# Altium PCB 超声波车位检测.PCBDOC
Units mil, origin at the board's own origin, x right, y up, seen from the top; angles counter-clockwise.
Board outline 6000 x 4000 mil, 2 copper layers (Top Layer, Bottom Layer); 26 components, 50 nets, 148 pads, 0 vias.
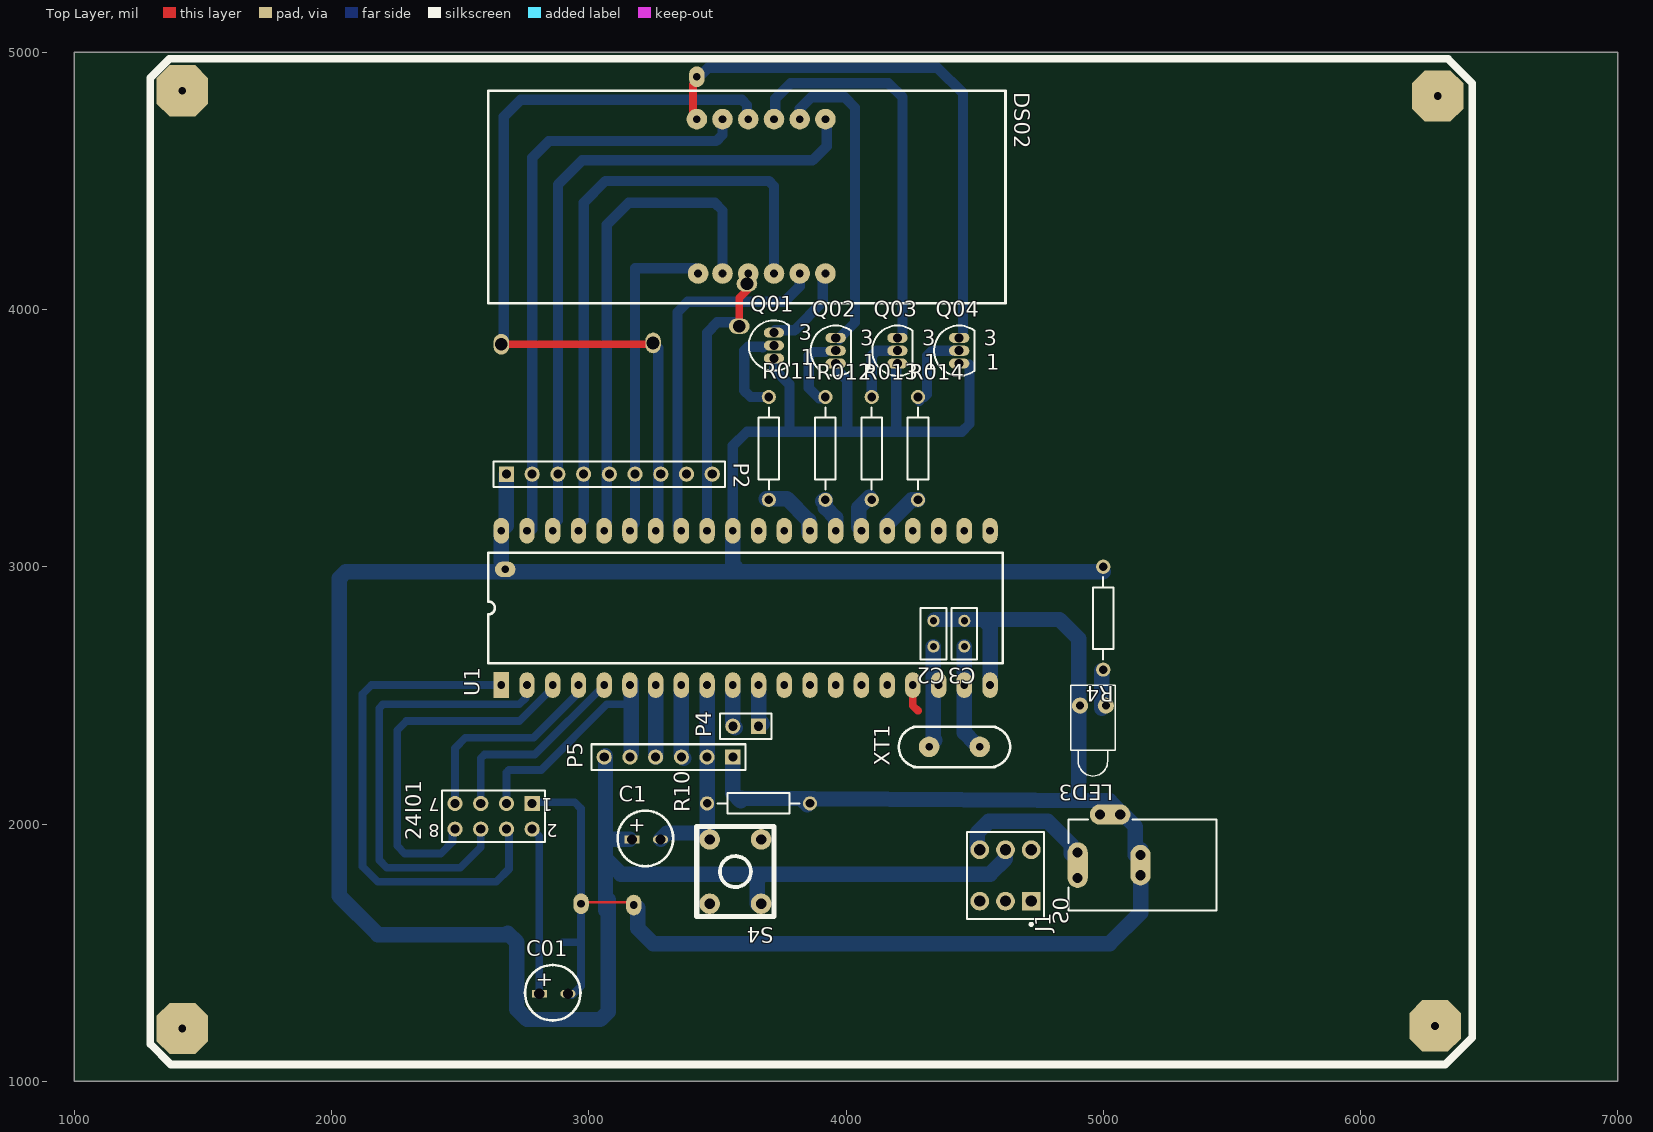
[diagram p0: Top Layer view]
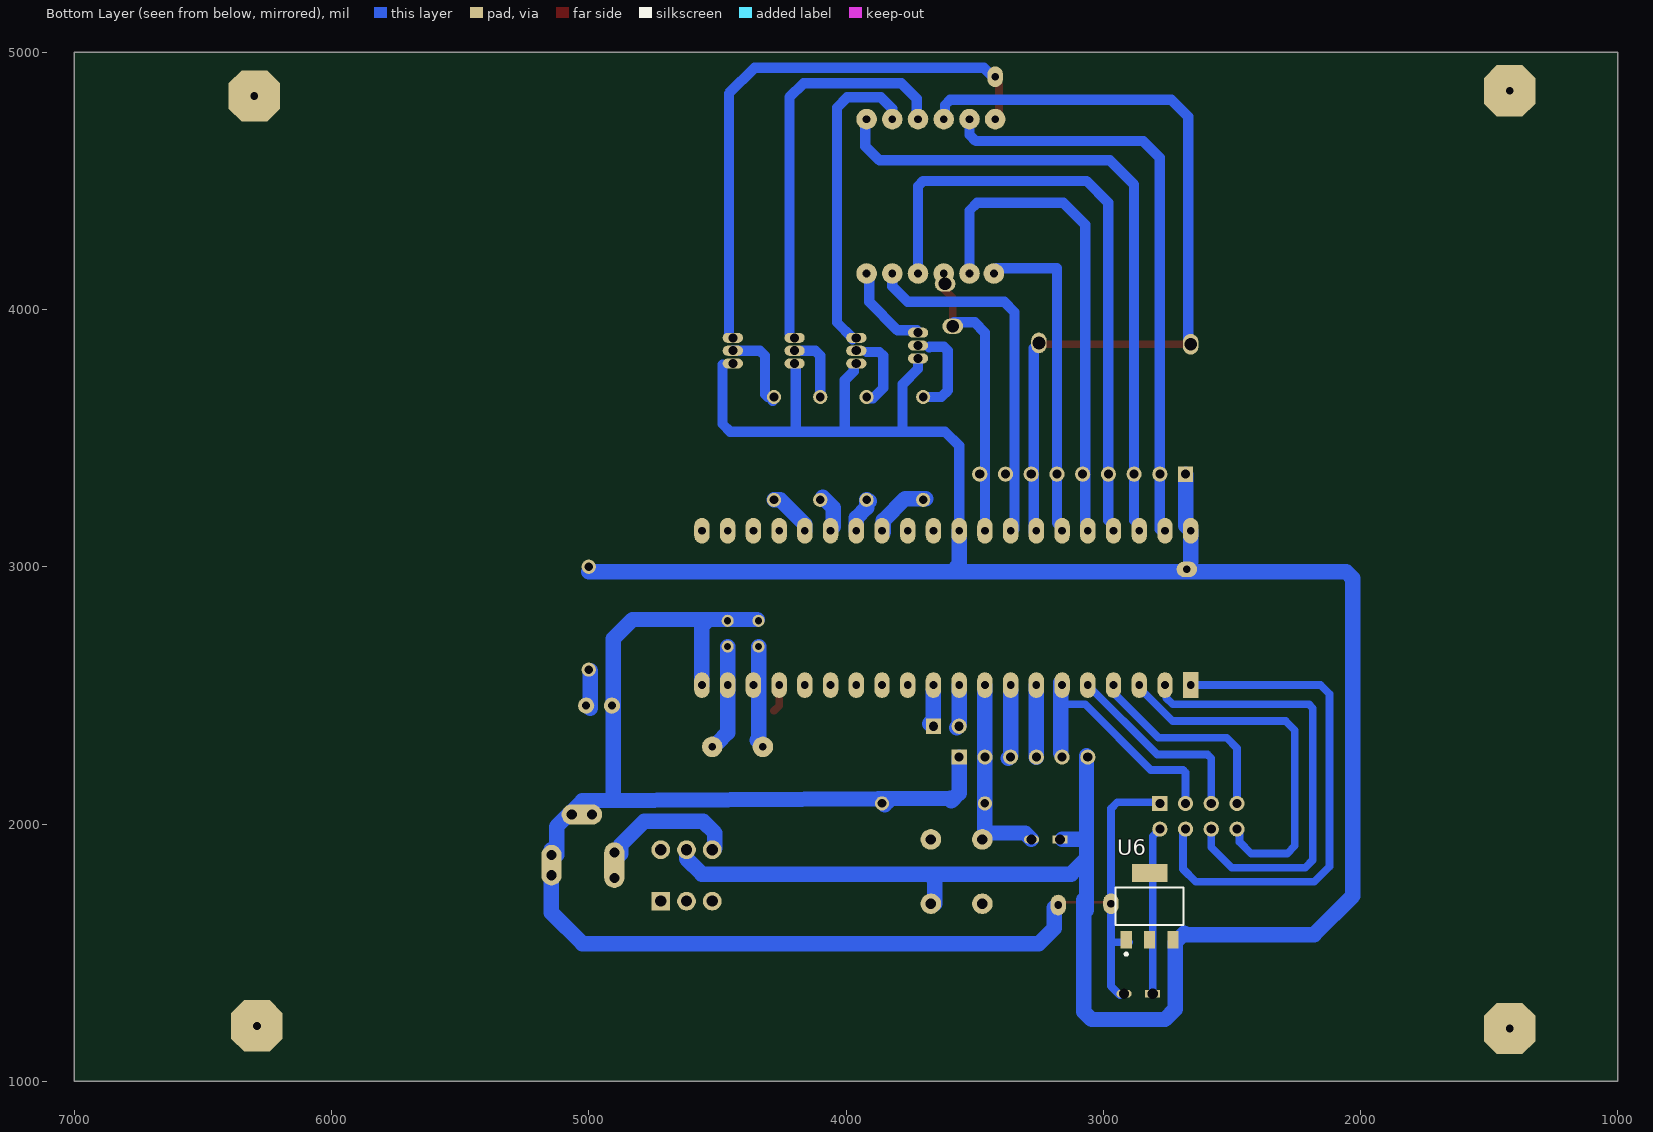
[diagram p1: Bottom Layer view, seen from below]

## Layer stack, top to bottom
Top Layer: signal copper 1.4
Dielectric: dielectric 12.6, FR-4, Dk 4.8
Bottom Layer: signal copper 1.4

## Board outline
1000,1000 7000,1000 7000,5000 1000,5000

## Design rules (kind name [scope] priority, off if disabled: settings)
Clearance [All] p1: gap=10
ComponentClearance [All] p1: gap=10 collisioncheckmode=3 verticalgap=10
PolygonConnect [All] p1: connectstyle=Relief reliefconductorwidth=10 reliefentries=4 polygonreliefangle="90 Angle"
RoutingVias [All] p1: holewidth=28 width=50 viastyle="Through Hole" minholewidth=28 minwidth=50 maxholewidth=28 maxwidth=50
SolderMaskExpansion [All] p1: expansion=4
TestPointUsage [All] p1: valid=0 allowmultiple=FALSE
Testpoint [All] p1: side=15 testpointundercomponent=TRUE minsize=40 maxsize=100 preferedsize=60 minholesize=0 maxholesize=40 preferedholesize=32 testpointgrid=1 style=1023 order=0-112345678
Width [All] p1: maxlimit=100 minlimit=10 preferedwidth=10 toplayer_prefwidth=30 bottomlayer_prefwidth=60 minimp=50.000000 maximp=50.000000 favimp=50.000000
17 further rules are at their usual default settings.

## Components (designator, comment, footprint, x,y, rotation, side; value= is the part's Value field where it differs from the comment)
24l01 "Header 4X2" HDR2X4 2780,2080 r180 top
C1 "Cap Pol1" 电容 3220,1920 r0 top
C01 "Cap Pol1" 电容 2860,1320 r0 top
C2 "Cap" RAD-0.1 4340,2740 r270 top
C3 "Cap" RAD-0.1 4460,2740 r270 top
DS02 "共阳" 4位带4点大数码管 3340,4300 r0 top
J1 "PWR2.5" KLD-0202 5440,1840 r180 top
LED3 "LED0" LED-1 4960,2460 r270 top
P2 "10K排阻" HDR1X9 2680,3360 r0 top
P4 "Header 2" HDR1X2 3660,2380 r180 top
P5 "Header 6H" HDR1X6 3560,2260 r180 top
Q01 "8550" BCY-W3/E4 3720,3860 r0 top
Q02 "8550" BCY-W3/E4 3960,3840 r0 top
Q03 "8550" BCY-W3/E4 4200,3840 r0 top
Q04 "8550" BCY-W3/E4 4440,3840 r0 top
R4 "Res2" AXIAL-0.4 5000,2800 r270 top
R10 "Res2" AXIAL-0.4 3660,2080 r180 top
R011 "Res2" AXIAL-0.4 3700,3460 r90 top
R012 "Res2" AXIAL-0.4 3920,3460 r90 top
R013 "Res2" AXIAL-0.4 4100,3460 r90 top
R014 "Res2" AXIAL-0.4 4280,3460 r90 top
S0 "SW-DPDT" DPDT-6 4620,1800 r90 top
S4 "SW-PB" 点动按键 3300,2100 r180 top
U1 "STC89C52" AT89S52 2660,2540 r90 top
U6 "LM317MBSTT3" 318E-04 2820,1680 r180 bottom
XT1 "XTAL2" 圆晶振 4520,2300 r180 top

## Footprints (in the part's own frame and the unit in brackets; to place one, negate y for a bottom-side part, rotate by r counter-clockwise, add the part's x,y. Pads: shape width x height; smd on the part's side, far side on the other; paste and mask are expansions set on the pad)
4位带4点大数码管 [mil]
  round 80 hole 30: 1(85,-160) 2(180,-160) 3(280,-160) 4(380,-160) 5(480,-160) 6(580,-160) 7(580,440) 8(480,440) 9(380,440) 10(280,440) 11(180,440) 12(80,440)
  silkscreen extent -730,-275 1280,550
318E-04 [mm] "SOT-223/SC-73; 4 Leads; Body 6.7 x 7.3 mm, inc. leads (LxW max)"
  rect 1.1x1.75 smd: 1(-2.3,-3.3) 2(0,-3.3) 3(2.3,-3.3)
  rect 3.5x1.75 smd: 4(0,3.3)
  silkscreen extent -3.35,-4.85 3.35,1.85
AT89S52 [mil]
  rect 100x60 hole 30: 1(0,0)
  oval 100x60 hole 30: 2(0,-100) 3(0,-200) 4(0,-300) 5(0,-400) 6(0,-500) 7(0,-600) 8(0,-700) 9(0,-800) 10(0,-900) 11(0,-1000) 12(0,-1100) 13(0,-1200) 14(0,-1300) 15(0,-1400) 16(0,-1500) 17(0,-1600) 18(0,-1700) 19(0,-1800) 20(0,-1900) 21(600,-1900) 22(600,-1800) 23(600,-1700) 24(600,-1600) 25(600,-1500) 26(600,-1400) 27(600,-1300) 28(600,-1200) 29(600,-1100) 30(600,-1000) 31(600,-900) 32(600,-800) 33(600,-700) 34(600,-600) 35(600,-500) 36(600,-400) 37(600,-300) 38(600,-200) 39(600,-100) 40(600,0)
  silkscreen extent 85,-1950 515,50
AXIAL-0.4 [mm] "Resistor; 2 Leads"
  round 1.4 hole 0.85: 1(-5.08,0) 2(5.08,0)
  silkscreen extent -4.06,-1.02 4.06,1.02
BCY-W3/E4 [mm] "TO, Flat Index; 3 In-Line, Axial Leads; Body Dia. 4.7mm"
  oval 2x1 hole 0.9: 1(0,-1.27) 2(0,0) 3(0,1.27)
  silkscreen extent -2.48,-2.48 1.5,2.48
DPDT-6 [mm] "Double-Pole, Double-Throw Switch; 6 Leads"
  rect 1.85x1.85 hole 1.1: 1(-2.54,-2.54)
  round 1.85 hole 1.1: 2(-2.54,0) 3(-2.54,2.54) 4(2.54,2.54) 5(2.54,0) 6(2.54,-2.54)
  silkscreen extent -4.96,-3.81 4.28,3.81
HDR1X2 [mm] "Connector; Header; 2 Position"
  rect 1.5x1.5 hole 0.9: 1(0,0)
  round 1.5 hole 0.9: 2(2.54,0)
  silkscreen extent -1.27,-1.27 3.81,1.27
HDR1X6 [mm] "Connector; Header; 6 Position"
  rect 1.5x1.5 hole 0.9: 1(0,0)
  round 1.5 hole 0.9: 2(2.54,0) 3(5.08,0) 4(7.62,0) 5(10.16,0) 6(12.7,0)
  silkscreen extent -1.27,-1.27 13.97,1.27
HDR1X9 [mm] "Connector; Header; 9 Position"
  rect 1.5x1.5 hole 0.9: 1(0,0)
  round 1.5 hole 0.9: 2(2.54,0) 3(5.08,0) 4(7.62,0) 5(10.16,0) 6(12.7,0) 7(15.24,0) 8(17.78,0) 9(20.32,0)
  silkscreen extent -1.27,-1.27 21.59,1.27
HDR2X4 [mm] "Connector; Header; 4x2 Position"
  rect 1.5x1.5 hole 0.9: 1(0,0)
  round 1.5 hole 0.9: 2(0,2.54) 3(2.54,0) 4(2.54,2.54) 5(5.08,0) 6(5.08,2.54) 7(7.62,0) 8(7.62,2.54)
  silkscreen extent -1.27,-1.27 8.89,3.81
KLD-0202 [mm] "DC Power Jack, 2.5mm, KLD Series, PCB Mount"
  oval 2x4.5 all layers, no hole: 1(13.7,0)
  round 1.5 hole 1: 1A(13.7,-1.25) 1B(13.7,1.25) 2A(7.5,-1) 2B(7.5,1) 3A(9.5,-5) 3B(11.5,-5)
  oval 2x4 all layers, no hole: 2(7.5,0)
  oval 4x2 all layers, no hole: 3(10.5,-5)
  silkscreen extent 0,-4.5 14.6,4.5
LED-1 [mm] "Typical RED GaAs LED; 2 Leads"
  round 1.6 hole 0.8: 1(0,1.27) 2(0,-1.27)
  silkscreen extent -2,-2.2 6.95,2.2
RAD-0.1 [mm] "Indicating Instrument; 2 Leads"
  round 1.2 hole 0.7: 1(-1.27,0) 2(1.27,0)
  silkscreen extent -2.54,-1.27 2.54,1.27
圆晶振 [mil]
  round 80 hole 30: 1(0,0) 2(196.85,0)
  silkscreen extent -118,-79 315,79
点动按键 [mil]
  round 80 hole 40: 1(-370,410) 2(-170,160) 3(-370,160) 4(-170,410)
  silkscreen extent -420,110 -120,460
电容 [mil]
  rect 59.05x30.24 hole 40: 1(-52,20)
  oval 59.05x30.24 hole 40: 2(59,20)
  silkscreen extent -108,-84 108,132

## Part data
24l01: "Header, 4-Pin, Dual row"
C1 C01: "Polarized Capacitor (Radial)"
C2 C3: "Capacitor"
DS02: library part HDSP-B03E, "14.22 mm GaP HER, Untinted, 88:88 4-Digit 7-Segment Display: CC, Gray Surface"
J1: "Low Voltage Power Supply Connector"
LED3: "Typical INFRARED GaAs LED"
P2: library part "Header 9", "Header, 9-Pin"
P4: "Header, 2-Pin"
P5: "Header, 6-Pin, Right Angle"
Q01 Q02 Q03 Q04: library part 2N3906, "PNP General Purpose Amplifier"
R4 R10 R011 R012 R013 R014: "Resistor"
S0: "Double-Pole, Double-Throw Switch"
S4: "Switch"
U1: library part AT89S52
U6: "Three-Terminal Adjustable Output Positive Voltage Regulator"

## Free pads (board coordinates)
  oval 60x80 hole 50: 0(3250,3870) 1(2660,3865)
  oct 200x200 hole 30: 1(1420,1205) 2(6290,1215) 3(6300,4830) 4(1420,4850)
  oval 60x80 hole 30: 1(3420,4905) 6(2970,1690) 7(3175,1685)
  oval 80x60 hole 50: 2(3585,3935) 3(3615,4100)
  oval 80x60 hole 30: 3(2675,2990)

## Nets (pads, with @x,y where several pads share a name; then routed paths per layer and width w, separated by ;. In a path a pad name is that pad's centre, name@x,y a point inside that pad or via, vN(x,y) a via of type N, cw(c..) or ccw(c..) an arc to the next point about the centre after c; other vN are vias at no path point)
3.3V: 24l01.2 C01.1 U6.2 U6.4 | length 651.6
  Bottom Layer w30: 24l01.2 2808,1952 C01.1
A: DS02.11 P2.2 U1.39 | length 2273.5
  Bottom Layer w40: U1.39@2765,3130 2780,3145 2780,4590 2845,4655 3495,4655 3520,4680 DS02.11@3520,4710
ALE: U1.30
B: DS02.7 P2.3 U1.38 | length 2530.4
  Bottom Layer w40: U1.38@2860,3160 2880,3180 2880,4485 2975,4580 3870,4580 3925,4635 DS02.7@3925,4725
C: DS02.4 P2.4 U1.37 | length 2372.6
  Bottom Layer w40: U1.37@2970,3170 2980,3180 2980,4415 3065,4500 3700,4500 3720,4480 DS02.4
CE: 24l01.3 P5.5 U1.6 | length 969.8
  Bottom Layer w30: 24l01.3 2680,2200 2690,2210 2815,2210 3070,2465 3145,2465
  Bottom Layer w60: P5.5@3165,2275 U1.6@3165,2550
CSN: 24l01.4 U1.1 | length 1990.1
  Bottom Layer w30: U1.1 2155,2540 2120,2505 2120,1835 2180,1775 2640,1775 2690,1825 24l01.4@2690,1975
D: DS02.2 P2.5 U1.36 | length 1918.8
  Bottom Layer w40: U1.36@3055,3160 3070,3175 3070,4330 3155,4415 3490,4415 3520,4385 DS02.2
DP: DS02.3 P2.9 pad.2@3585,3935 pad.3@3615,4100 U1.32 | length 1087.3
  Top Layer w30: pad.2@3585,3935 3585,4045 pad.3@3635,4095
  Bottom Layer w40: U1.32 3460,3910 3500,3950 pad.2@3580,3950
E: DS02.1 P2.6 U1.35 | length 1246.2
  Bottom Layer w40: U1.35@3165,3155 3180,3170 3180,4160 DS02.1@3415,4160
ECHO1: U1.13
ECHO2: U1.14
ECHO3: U1.15
ECHO4: U1.16
F: DS02.10 P2.7 pad.0 pad.1@2660,3865 U1.34 | length 3240.6
  Top Layer w30: pad.1@2670,3865 3245,3865 pad.0
  Bottom Layer w40: pad.1@2670,3855 2670,4750 2735,4815 3595,4815 3615,4795 DS02.10@3615,4755 ; pad.0 3270,3850 U1.34@3270,3135
G: DS02.5 P2.8 U1.33 | length 1371.4
  Bottom Layer w40: U1.33@3345,3145 3345,3990 3385,4030 3760,4030 3820,4090 3820,4100
GND: 24l01.1 C01.2 C2.1 C3.1 J1.2 J1.2A J1.2B J1.3 J1.3A J1.3B LED3.2 P5.1 pad.6 pad.7 R10.1 U1.20 U6.1 | length 6896.6
  Top Layer w10: pad.6@2980,1695 pad.7@3180,1695
  Bottom Layer w30: 24l01.1@2790,2085 2945,2085 2970,2060 2970,1370 C01.2@2935,1335 ; U6.1@2900,1540 2965,1540
  Bottom Layer w60: pad.7@3190,1675 3190,1595 3250,1535 5025,1535 5145,1655 J1.2A@5145,1900 ; P5.1 3560,2120 3590,2090 ; 3595,2100 5025,2090 5125,1990 J1.2A@5125,1879.37 ; R10.1@3835,2090 R10.1@3850,2075 ; C2.1@4345,2795 4830,2795 4905,2720 4905,2115 ; 4535,2795 4560,2770 U1.20
IRQ: 24l01.8 U1.3 | length 1410.3
  Bottom Layer w30: 24l01.8@2470,1985 2470,1930 2425,1885 2285,1885 2255,1915 2255,2365 2290,2400 2730,2400 U1.3@2850,2520
K1: DS02.6 Q01.3 | length 325.6
  Bottom Layer w40: Q01.3@3725,3920 3800,3920 3910,4030 DS02.6@3910,4125
K2: DS02.8 Q02.3 | length 1175.1
  Bottom Layer w40: 3820,4780 3865,4825 3995,4825 4035,4785 4035,3949.68 3975,3889.68 Q02.3@3975,3885
K3: DS02.9 Q03.3 | length 1527.6
  Bottom Layer w40: DS02.9@3725,4755 3725,4820 3785,4880 4165,4880 4220,4825 Q03.3@4220,3905
K4: DS02.12 pad.1@3420,4905 Q04.3 | length 2160.9
  Top Layer w30: DS02.12@3405,4735 pad.1@3405,4875
  Bottom Layer w40: pad.1@3430,4905 3465,4940 4355,4940 4455,4840 Q04.3@4455,3900
MISO: 24l01.7 U1.4 | length 784.1
  Bottom Layer w30: 24l01.7 2480,2295 2520,2335 2785,2335 U1.4@2960,2510
MOSI: 24l01.6 U1.2 | length 1717.1
  Bottom Layer w30: 24l01.6 2580,1910 2500,1830 2215,1830 2185,1860 2185,2450 2200,2465 2730,2465 2755,2490 U1.2@2755,2520
NetJ1_1: J1.1 J1.1A J1.1B S0.4 | length 530.1
  Bottom Layer w60: S0.4@4510,1905 4510,1965 4555,2010 4785,2010 4875,1920 4875,1885 J1.1A@4885,1875
NetLED3_1: LED3.1 R4.2 | length 145
  Bottom Layer w60: LED3.1@4995,2450 R4.2@4995,2595
NetQ01_2: Q01.2 R011.2 | length 338.6
  Bottom Layer w40: 3676.43,3853.57 3675,3855 3620,3855 3605,3840 3605,3685 3630,3660 R011.2
NetQ02_2: Q02.2 R012.2 | length 272
  Bottom Layer w40: R012.2@3915,3655 3895,3655 3855,3695 3855,3820 3870,3835 3919.25,3835
NetQ03_2: Q03.2 R013.2 | length 238.3
  Bottom Layer w40: R013.2 4100,3820 4120,3840 Q03.2@4170,3840
NetQ04_2: Q04.2 R014.2 | length 327.4
  Bottom Layer w40: R014.2 4305,3660 4315,3670 4315,3820 4335,3840 Q04.2 ; R014.2@4285,3645 R014.2@4285,3650
P14: 24l01.5 U1.5 | length 773.1
  Bottom Layer w30: 24l01.5 2580,2255 2595,2270 2790,2270 U1.5
P16: P5.4 U1.7 | length 280
  Bottom Layer w60: P5.4 U1.7
P17: P5.3 U1.8 | length 269.1
  Bottom Layer w60: U1.8@3360,2520 3360,2265 P5.3@3370,2255
P20: U1.21
P21: U1.22
P22: U1.23
P23: U1.24
P24: R014.1 U1.25 | length 224.4
  Top Layer w10: U1.25@4160,3100 U1.25
  Bottom Layer w60: U1.25 4160,3165 4255,3260 R014.1
P25: R013.1 U1.26 | length 131.6
  Bottom Layer w60: U1.26@4050,3155 4050,3230 R013.1@4090,3270
P26: R012.1 U1.27 | length 146.6
  Bottom Layer w60: R012.1@3910,3255 R012.1@3920,3255 ; R012.1 3920,3230 3960,3190 U1.27
P27: R011.1 U1.28 | length 245.2
  Bottom Layer w60: R011.1@3690,3265 3770,3265 3855,3180 U1.28@3855,3135
P30: P4.2 U1.10 | length 169.1
  Bottom Layer w60: U1.10 3560,2385 P4.2@3570,2375
P31: P4.1 U1.11 | length 136.2
  Bottom Layer w60: U1.11@3660,2520 3660,2405 P4.1@3675,2390
P32: U1.12
P37: U1.17 | length 108.3
  Top Layer w30: U1.17 4260,2460 4280,2440
PSEN: U1.29
RST: C1.2 P5.2 R10.2 S4.2 U1.9 | length 763.4
  Bottom Layer w60: C1.2 3304,1965 3455,1965 3460,1970 U1.9
VCC: C1.1 P2.1 P5.6 pad.3@2675,2990 Q01.1 Q02.1 Q03.1 Q04.1 R4.1 S0.5 S4.1 U1.31 U1.40 U6.3 | length 11309.5
  Top Layer w10: pad.3@2665,2985 pad.3@2670,2980
  Bottom Layer w40: U1.31@3560,3130 3560,3470 3615,3525 4450,3525 4480,3555 4480,3785 ; Q01.1 3720,3770 3780,3710 3780,3525 ; Q02.1@3970,3785 3970,3760 4005,3725 4005,3540 ; 4195,3535 Q03.1@4195,3775
  Bottom Layer w60: 2660,3020 U1.40 ; U1.40@2670,3150 2680,3160 P2.1 ; 2675,1570 2180,1570 2030,1720 2030,2955 2055,2980 R4.1@5000,2980 ; 2685.63,1575 2720,1540.63 2720,1280 2760,1240 3045,1240 3075,1270 3075,1705 ; 3065,1665 P5.6@3065,2265 ; 3065,1865 3125,1805 4560,1805 4620,1865 S0.5 ; 3090,1940 C1.1@3160,1940 ; U1.31 3560,2990 3570,3000 ; S4.1@3655,1690 3655,1785 3665,1795
XT1: C3.2 U1.19 XT1.1 | length 391.6
  Bottom Layer w60: C3.2 4460,2355 XT1.1@4500,2315
XT2: C2.2 U1.18 XT1.2 | length 367.1
  Bottom Layer w60: C2.2 4340,2330 XT1.2@4345,2325
pads on no net: S0.1 S0.2 S0.3 S0.6 S4.3 S4.4

## Silkscreen, mask and mechanical layers (free items; w line width, h text height)
Top Overlay:
  lines w30: 1295,4790 1295,4900 1370,4975 6340,4975 6435,4880 6435,1170 6330,1065 1375,1065 1295,1145 1295,4875

## Text inside footprints (layer, text, board x,y; h text height)
24l01: Top Overlay "2" at 2880,2000 h50 r180; Top Overlay "1" at 2860,2100 h50 r180; Top Overlay "7" at 2420,2100 h50 r180; Top Overlay "8" at 2420,2000 h50 r180
C1: Top Overlay "+" at 3153,1970 h60
C01: Top Overlay "+" at 2793,1370 h60
J1: Mechanical 1 "Alert PCB fab to slot details" at 5428.74,1601.18 h11.81 r180; Mechanical 1 "Assign keep-out area to slot" at 5428.74,1581.5 h11.81 r180; Mechanical 1 "Mech 1 - Slot cut-out" at 5428.74,1620.87 h11.81 r180; Mechanical 1 "Mech 2 - Clearance, move to internal plane if present" at 5428.74,1640.56 h11.81 r180
Q01: Top Overlay "3" at 3815.67,3880.08 h59.05; Top Overlay "1" at 3824.72,3785.2 h59.05
Q02: Top Overlay "3" at 4055.67,3860.08 h59.05; Top Overlay "1" at 4064.72,3765.2 h59.05
Q03: Top Overlay "3" at 4295.67,3860.08 h59.05; Top Overlay "1" at 4304.72,3765.2 h59.05
Q04: Top Overlay "3" at 4535.67,3860.08 h59.05; Top Overlay "1" at 4544.72,3765.2 h59.05